# EAGLE board GRBLController (EAGLE 9.6.1)
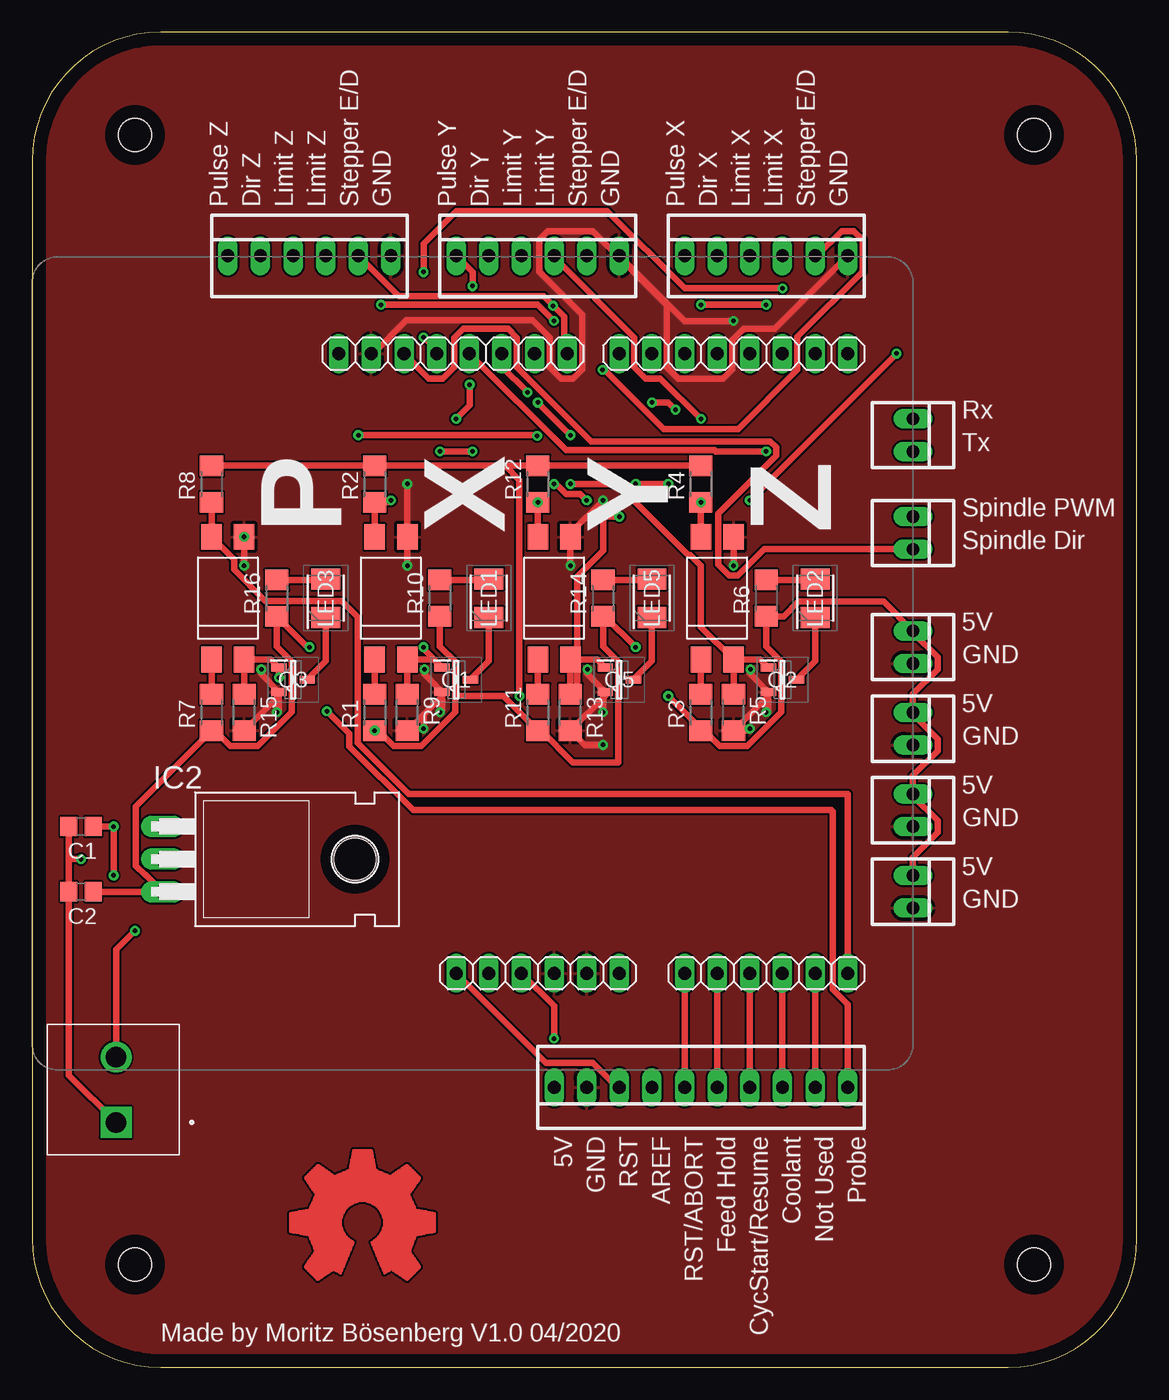
[diagram p0: board, top side]
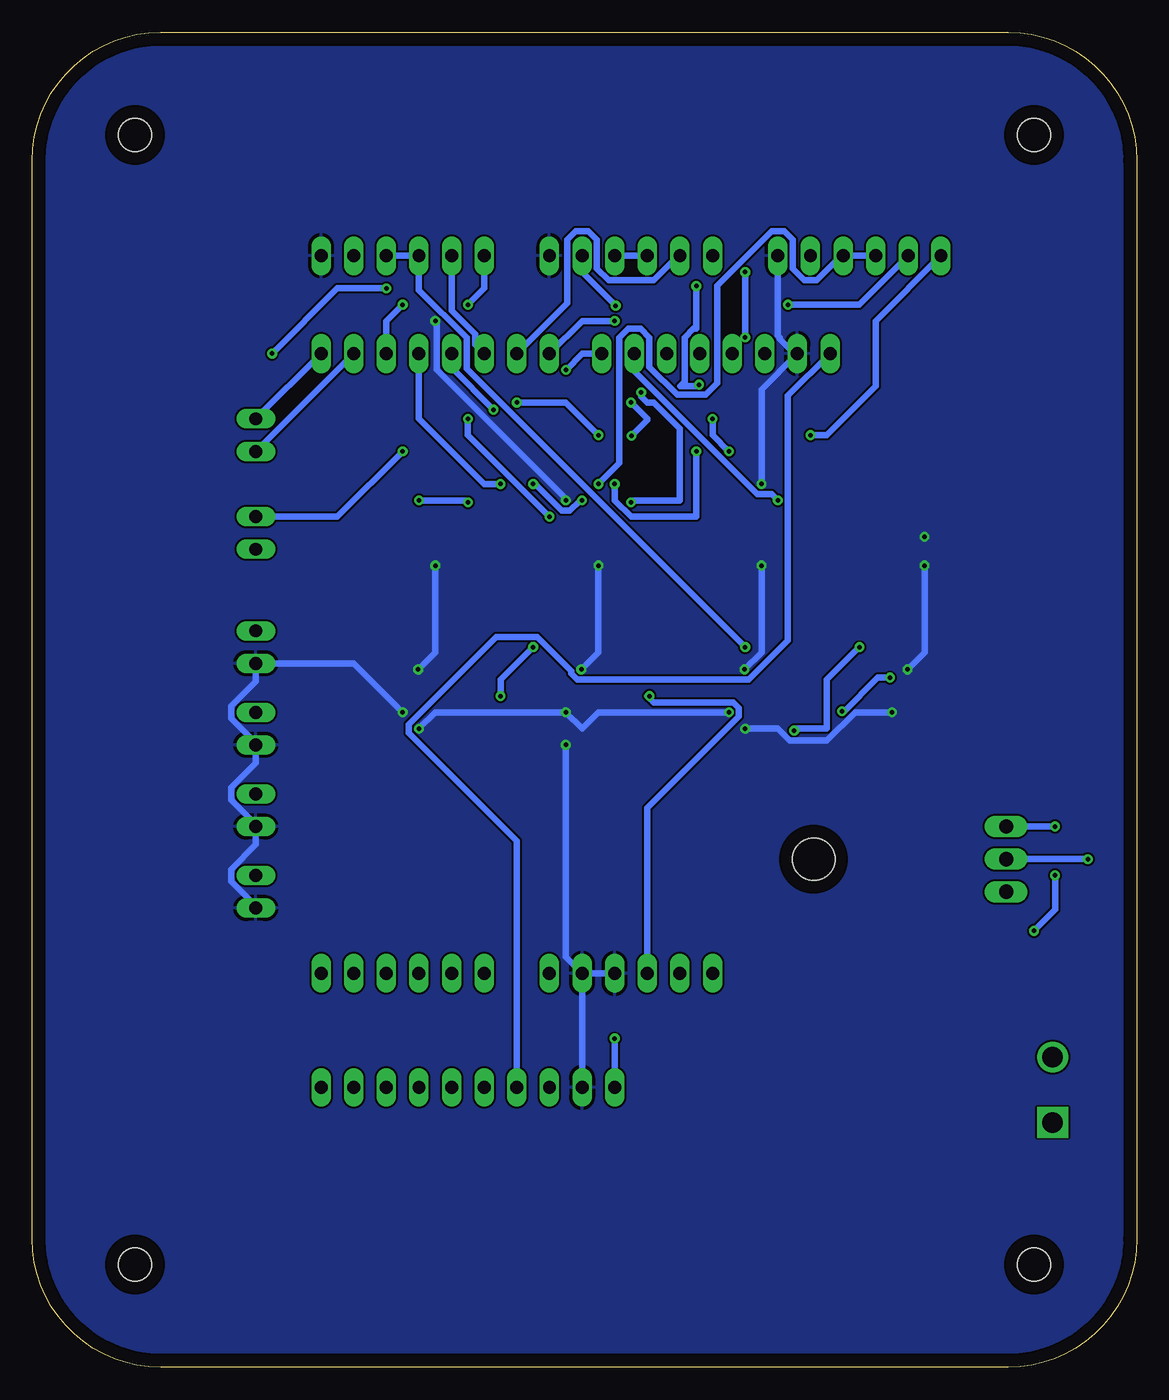
[diagram p1: board, bottom side, seen from below]

Size 86 x 104 mm. Coordinates in mm from the lower left corner, seen from the top.
Outline: 0,94 0,10 arc90 10,0 76,0 arc90 86,10 86,94 arc90 76,104 10,104 arc90 0,94
Copper layers (1*16): Top 0.035mm / dielectric 1.5mm / Bottom 0.035mm
Design rules "default": minimum track width 6mil, minimum drill 0.35mm, track to track 6mil, track to pad 6mil, pad to pad 6mil, via to via 6mil, smd to smd 6mil, copper to edge 40mil, drill to drill 6mil, minimum pad ring 10mil, minimum via ring 8mil, stop-mask expansion 4mil, vias tented up to drill 0mil, thermal gap 10mil
Holes 2.6 mm at 78,96 78,8 8,8 8,96

## Footprints (pad centres in the part's own frame; a part is rotated, then mirrored left to right if it is on the bottom)
C0805 = smd 1.3 x 1.5: 1 -0.95,0; 2 0.95,0
ARDUINO2009_2 = drill 1.016 long: 1 33.02,2.54; 2 35.56,2.54; 3 38.1,2.54; 4 40.64,2.54; 5 43.18,2.54; 6 45.72,2.54; 7 50.8,2.54; 8 53.34,2.54; 9 55.88,2.54; 10 58.42,2.54; 11 60.96,2.54; 12 63.5,2.54; 13 63.5,50.8; 14 60.96,50.8; 15 58.42,50.8; 16 55.88,50.8; 17 53.34,50.8; 18 50.8,50.8; 19 48.26,50.8; 20 45.72,50.8; 21 41.656,50.8; 22 39.116,50.8; 23 36.576,50.8; 24 34.036,50.8; 25 31.496,50.8; 26 28.956,50.8; 27 26.416,50.8; 28 23.876,50.8
TO220H = drill 1.118 long: 1 -2.54,-10.16; 2 0,-10.16; 3 2.54,-10.16 | hole 3.302: 0,4.826
CUI_TB007-508-02BE = drill 1.6 square: 1 0,0 | drill 1.6: 2 5.08,0
LEDM3528X200N = smd 1.65 x 2.25: 1 -1.5,0; 2 1.5,0
DIL4-SMD = smd 1.6 x 2: 1 -1.27,-4.77; 2 1.27,-4.77; 3 1.27,4.77; 4 -1.27,4.77
SOT95P237X122-3N = smd 1.2 x 0.6: 1 -1.1,0.95; 2 -1.1,-0.95; 3 1.1,0
R1206 = smd 1.6 x 1.803: 1 -1.422,0; 2 1.422,0
22-23-2021 = drill 1 long: 1 -1.27,0; 2 1.27,0
22-23-2101 = drill 1 long: 1 -11.43,0; 2 -8.89,0; 3 -6.35,0; 4 -3.81,0; 5 -1.27,0; 6 1.27,0; 7 3.81,0; 8 6.35,0; 9 8.89,0; 10 11.43,0
22-23-2061 = drill 1 long: 1 -6.35,0; 2 -3.81,0; 3 -1.27,0; 4 1.27,0; 5 3.81,0; 6 6.35,0

## Placement (x,y rotation side)
C1  470nF  [C0805]  3.81,42.13 180 top
C2  100nF  [C0805]  3.81,37.05 180 top
IC1  [ARDUINO2009_2]  0,28.16 0 top
IC2  7805T  [TO220H]  20.32,39.59 270 top
J1  SCREW_PITCH_508  [CUI_TB007-508-02BE]  6.54,19.08 90 top
LED1  PLCC2  [LEDM3528X200N]  35.56,59.91 90 top
LED2  PLCC2  [LEDM3528X200N]  60.96,59.91 90 top
LED3  PLCC2  [LEDM3528X200N]  22.86,59.91 90 top
LED5  PLCC2  [LEDM3528X200N]  48.26,59.91 90 top
OK1  LTVOPTOS  [DIL4-SMD]  27.94,59.91 0 top
OK2  LTVOPTOS  [DIL4-SMD]  53.34,59.91 0 top
OK3  LTVOPTOS  [DIL4-SMD]  15.24,59.91 0 top
OK5  LTVOPTOS  [DIL4-SMD]  40.64,59.91 0 top
Q1  FDN5632N-F085  [SOT95P237X122-3N]  33.02,53.56 0 top
Q2  FDN5632N-F085  [SOT95P237X122-3N]  58.42,53.56 0 top
Q3  FDN5632N-F085  [SOT95P237X122-3N]  20.32,53.56 0 top
Q5  FDN5632N-F085  [SOT95P237X122-3N]  45.72,53.56 0 top
R1  220  [R1206]  26.67,51.02 90 top
R2  1K  [R1206]  26.67,68.8 90 top
R3  220  [R1206]  52.07,51.02 90 top
R4  1K  [R1206]  52.07,68.8 90 top
R5  10K  [R1206]  54.61,51.02 270 top
R6  10K  [R1206]  57.15,59.91 90 top
R7  220  [R1206]  13.97,51.02 90 top
R8  1K  [R1206]  13.97,68.8 90 top
R9  10K  [R1206]  29.21,51.02 270 top
R10  10K  [R1206]  31.75,59.91 90 top
R11  220  [R1206]  39.37,51.02 90 top
R12  1K  [R1206]  39.37,68.8 90 top
R13  10K  [R1206]  41.91,51.02 270 top
R14  10K  [R1206]  44.45,59.91 90 top
R15  10K  [R1206]  16.51,51.02 270 top
R16  10K  [R1206]  19.05,59.91 90 top
X1  22-23-2021  [22-23-2021]  68.58,72.61 270 top
X2  22-23-2021  [22-23-2021]  68.58,64.99 270 top
X3  22-23-2101  [22-23-2101]  52.07,21.81 180 top
X4  22-23-2021  [22-23-2021]  68.58,56.1 270 top
X5  [22-23-2061]  57.15,86.58 0 top
X6  [22-23-2061]  39.37,86.58 0 top
X7  [22-23-2061]  21.59,86.58 0 top
X8  22-23-2021  [22-23-2021]  68.58,49.75 270 top
X9  22-23-2021  [22-23-2021]  68.58,43.4 270 top
X10  22-23-2021  [22-23-2021]  68.58,37.05 270 top

## Library data of the parts
C1 C2 = CommonParts; SPICEPREFIX: C
IC1 OK1-OK3 OK5 R1-R16 = CommonParts
IC2 = linear
J1 = CommonParts; CUI_PURCHASE_URL: https://www.cui.com/product/interconnect/connectors/terminal-blocks/tb007-508-series?utm_source=snapeda.com&utm_medium=referral&utm_campaign=snapedaBOM; DESCRIPTION: 2~24 Poles, Screw Type, Horizontal, 5.08 Pitch, 24~12 _AWG_, Terminal Block Connector; DIGI-KEY_PART_NUMBER: 102-6203-ND; DIGI-KEY_PURCHASE_URL: https://www.digikey.com/product-detail/en/cui-inc/TB007-508-02BE/102-6203-ND/10064127?utm_source=snapeda&utm_medium=aggregator&utm_campaign=symbol; MF: CUI Inc.; MP: TB007-508-02BE; PACKAGE: None
LED1-LED3 LED5 = CommonParts; DESCRIPTION: Cool White SMT LED, PLCC2 1800mcd Min. Broadcom ASMT-UWB1-NX302, ASMT-UWB Series White LED, 6250K, PLCC 2, Round Lens SMD package; HEIGHT: 2mm; MANUFACTURER_NAME: Avago Technologies; MANUFACTURER_PART_NUMBER: ASMT-UWB1-NX302; MOUSER2_PART_NUMBER: 630-ASMT-UWB1-NX302; MOUSER2_PRICE-STOCK: https://www.mouser.com/Search/Refine.aspx?Keyword=630-ASMT-UWB1-NX302
Q1-Q3 Q5 = CommonParts; DESCRIPTION: MOSFET Trans MOS N-Ch 60V 1.7A; HEIGHT: 1.22mm; MANUFACTURER_NAME: ON Semiconductor; MANUFACTURER_PART_NUMBER: FDN5632N-F085; MOUSER_PART_NUMBER: 512-FDN5632N-F085; MOUSER_PRICE-STOCK: https://www.mouser.com/Search/Refine.aspx?Keyword=512-FDN5632N-F085
X1 X2 X4 X8-X10 = con-molex; MF: MOLEX; MPN: 22-23-2021; OC_FARNELL: 1462926; OC_NEWARK: 25C3832
X3 = con-molex; MF: MOLEX; MPN: 22-23-2101; OC_FARNELL: 1756828; OC_NEWARK: 94C0765
X5-X7 = con-molex; MF: MOLEX; MPN: 22-23-2061; OC_FARNELL: 1462922; OC_NEWARK: 27C1933

## Nets
5V_ARDUINO: IC1.3 R2.2 R4.2 R8.2 R12.2 X3.10
5V_O: C2.1 IC2.3 R1.1 R3.1 R6.1 R7.1 R10.1 R11.1 R14.1 R16.1 X4.1 X8.1 X9.1 X10.1
24V: C1.1 IC2.1 J1.2
!RESET: IC1.1 X3.8
+3V3: IC1.2
+VIN: IC1.6
AGND: IC1.4 IC1.5 IC1.27 OK1.3 OK2.3 OK3.3 OK5.3 Q1.2 Q2.2 Q3.2 Q5.2 R5.2 R9.2 R13.2 R15.2 X3.9 X4.2 X5.6 X6.6 X7.6 X8.2 X9.2 X10.2
AREF: IC1.28 X3.7
COOLANT: IC1.10 X3.3
CYCLE_START/RESUME: IC1.9 X3.4
DIRECTION_X: IC1.18 X5.2
DIRECTION_Y: IC1.19 X6.2
DIRECTION_Z: IC1.20 X7.2
FEED_HOLD: IC1.8 X3.5
LIMIT_X: IC1.22 OK1.4 R2.1
LIMIT_X_SCREW: OK1.2 Q1.1 R9.1 X5.3 X5.4
LIMIT_Y: IC1.23 OK5.4 R12.1
LIMIT_Y_SCREW: OK5.2 Q5.1 R13.1 X6.3 X6.4
LIMIT_Z: IC1.25 OK2.4 R4.1
LIMIT_Z_SCREW: OK2.2 Q2.1 R5.1 X7.3 X7.4
N$1: OK1.1 R1.2
N$3: LED1.2 R10.2
N$4: LED1.1 Q1.3
N$5: OK5.1 R11.2
N$7: LED5.2 R14.2
N$8: LED5.1 Q5.3
N$9: OK2.1 R3.2
N$11: LED2.2 R6.2
N$12: LED2.1 Q2.3
N$13: OK3.1 R7.2
N$15: LED3.2 R16.2
N$16: LED3.1 Q3.3
N$17: C1.2 C2.2 IC2.2 J1.1
NOT_USED: IC1.11 X3.2
PROBE: IC1.12 OK3.4 R8.1
PROBE_SCREW: OK3.2 Q3.1 R15.1 X3.1
PULSE_X: IC1.15 X5.1
PULSE_Y: IC1.16 X6.1
PULSE_Z: IC1.17 X7.1
RESET/ABORT: IC1.7 X3.6
RX: IC1.13 X1.1
SPINDLE_DIRECTION: IC1.26 X2.2
SPINDLE_PWM: IC1.24 X2.1
STEPPER_ENABLE/DISABLE: IC1.21 X5.5 X6.5 X7.5
TX: IC1.14 X1.2

## Tracks (layer width: path | path; a pad name or v marks a point on that pad's centre or on a via)
5V_ARDUINO  (via drill 0.35)
  Top 0.508: R8.2 R2.2 36.83,70.22 | 36.83,70.22 R12.2 R4.2 | IC1.3 40.64,28.16 v40.64,25.62 | v37.94,52.29 37.94,69.11 36.83,70.22
  Bottom 0.508: v40.64,25.62 X3.10 | IC1.3 38.1,43.56 30.96,50.7 30.96,51.34 31.43,51.8 37.62,51.8 38.1,52.29 v37.94,52.29
5V_O  (via drill 0.35)
  Top 0.508: 32.93,52.29 32.93,51.04 30.28,48.39 28.14,48.39 26.93,49.6 R1.1 | 32.93,52.29 32.93,54.98 31.75,56.16 R10.1 31.75,58.64 | C2.1 IC2.3 8.87,38.34 8.81,38.34 8.08,39.07 8.08,43.7 R7.1 14.23,49.6 15.44,48.39 17.58,48.39 20.23,51.04 20.23,54.98 19.05,56.16 R16.1 21.44,56.1 v21.59,56.1 | 32.93,52.29 36.68,52.29 R11.1 39.63,49.6 42.11,47.12 45.63,47.12 45.63,54.98 44.45,56.16 R14.1 44.6,58.49 v46.99,56.1 | v49.53,52.29 52.07,49.75 R3.1 52.33,49.6 53.54,48.39 55.68,48.39 58.33,51.04 58.33,54.98 57.15,56.16 R6.1 58.51,58.49 59.67,59.64 66.31,59.64 X4.1 68.58,57.23 70.49,55.31 70.49,54.35 68.58,52.44 X8.1 68.58,50.88 70.49,48.96 70.49,48 68.58,46.09 X9.1 68.58,44.52 70.49,42.61 70.49,41.65 68.58,39.73 X10.1
  Bottom 0.508: v21.59,56.1 24.13,53.56 24.13,49.75 26.67,49.75 R1.1 | v46.99,56.1 49.53,53.56 v49.53,52.29
  other vias: 26.67,49.6
24V  (via drill 0.35)
  Top 0.508: C1.1 v6.35,42.13 v6.35,38.32 | J1.2 6.54,32.54 v8,34
  Bottom 0.508: IC2.1 v6.35,42.13 | v8,34 6.35,35.65 v6.35,38.32
!RESET
  Top 0.508: IC1.1 40,23.72 43.66,23.72 45.58,21.81 X3.8
AGND  (via drill 0.35)
  Top 0.508: Q2.2 57.32,52.31 R5.2 55.73,49.6 v55.88,49.75 | Q5.2 44.62,52.31 R13.2 43.03,48.48 v44.45,48.48 | Q1.2 31.92,52.31 30.48,50.87 | 30.48,50.87 R9.2 | Q3.2 19.22,52.31 R15.2 | Q3.2 17.84,53.99 v17.84,54.35 | v16.51,62.45 OK3.3 | Q1.2 30.54,53.99 v30.54,54.35 | v29.21,62.45 OK1.3 v29.21,68.8 | Q5.2 43.18,54.05 43.18,54.48 43.24,54.42 v43.24,54.35 | v41.91,62.45 OK5.3 41.91,64.99 v44.45,67.53 | Q2.2 55.88,54.05 55.88,54.48 55.94,54.42 v55.94,54.35 | v54.61,62.45 OK2.3 | Q3.2 19.22,51.19 v19.05,51.02 | v30.48,49.75 30.48,50.87 | Q1.2 31.92,51.19 v31.75,51.02 | v44.45,51.02 44.45,52.44 Q5.2 | Q2.2 57.32,51.19 v57.15,51.02 | v54.61,81.5 50.8,81.5 X6.6 | X5.6 57.81,80.89 55.4,80.89 54.51,80 54.51,77.71 53.82,77.03 50.32,77.03 49.43,77.92 49.43,82.73 43.66,88.49 40.16,88.49 39.48,87.81 39.48,85.34 42.82,82 42.82,77.71 42.14,77.03 41.17,77.03 40.28,77.92 40.28,80.21 38.94,81.55 29.13,81.55 26.54,78.96 IC1.27
  Bottom 0.508: v17.84,54.35 16.51,55.69 v16.51,62.45 | v30.54,54.35 29.21,55.69 v29.21,62.45 | v43.24,54.35 41.91,55.69 v41.91,62.45 | v55.94,54.35 54.61,55.69 v54.61,62.45 | v19.05,51.02 21.93,51.02 24.13,48.81 27,48.81 27.93,49.75 v30.48,49.75 | v31.75,51.02 41.91,51.02 43.18,49.75 v44.45,51.02 54.61,51.02 v55.88,49.75 | v29.21,68.8 29.21,76.17 26.54,78.83 | 26.54,78.83 IC1.27 | X7.6 27.94,80.36 27.79,80.21 27.79,80.08 26.54,78.83 | v57.15,51.02 60.96,54.83 X4.2 68.58,53.41 70.49,51.5 70.49,50.54 68.58,48.62 X8.2 68.58,47.06 70.49,45.15 70.49,44.19 68.58,42.27 X9.2 68.58,40.72 70.49,38.8 70.49,37.84 68.58,35.92 X10.2 | v54.61,81.5 54.51,81.4 54.51,77.71 44.45,67.66 v44.45,67.53 | IC1.4 IC1.5 | IC1.5 X3.9 | v44.45,48.48 44.45,31.97 IC1.5
  other vias: 16.51,64.68
  pour Top: 0,104 86,104 86,0 0,0
  pour Bottom: 0,104 86,104 86,0 0,0
AREF
  Bottom 0.508: X3.7 48.26,41.02 56.66,49.42 56.66,50.08 49.85,56.88 46.66,56.88 44.02,54.24 44.02,54.03 43.57,53.57 30.22,53.57 27.16,56.63 27.16,75.68 IC1.28
COOLANT
  Top 0.508: IC1.10 X3.3
CYCLE_START/RESUME
  Top 0.508: IC1.9 X3.4
DIRECTION_X
  Bottom 0.508: X5.2 53.34,82.31 51.51,80.48 51.51,79.67 IC1.18
DIRECTION_Y
  Bottom 0.508: X6.2 35.7,86.58 37.62,84.67 41.12,84.67 42.02,85.56 42.02,87.81 42.7,88.49 43.66,88.49 44.34,87.81 44.34,82.88 IC1.19
DIRECTION_Z  (via drill 0.35)
  Top 0.508: v27.16,82.77 39.37,82.77 v40.64,81.5
  Bottom 0.508: X7.2 21.59,82.77 v27.16,82.77 | v40.64,81.5 43.18,81.5 IC1.20
FEED_HOLD
  Top 0.508: IC1.8 X3.5
LIMIT_X  (via drill 0.35)
  Top 0.508: OK1.4 R2.1 27.79,67.38 v27.94,67.53
  Bottom 0.508: v27.94,67.53 28.43,68.02 29.54,68.02 39.12,77.6 IC1.22
LIMIT_X_SCREW  (via drill 0.35)
  Top 0.508: R9.1 OK1.2 31.29,55.14 Q1.1 30.48,55.95 v30.48,56.1
  Bottom 0.508: v30.48,56.1 52.17,77.79 52.17,80.21 55.88,83.91 X5.3 X5.4
LIMIT_Y  (via drill 0.35)
  Top 0.508: OK5.4 R12.1 | v38.58,75.94 36.58,77.94 IC1.23
  Bottom 0.508: R12.1 39.22,67.53 35.56,67.53 35.56,73.11 37.6,75.15 38.1,75.15 38.58,75.62 v38.58,75.94
  other vias: 39.37,67.38
LIMIT_Y_SCREW  (via drill 0.35)
  Top 0.508: Q5.1 43.99,55.14 OK5.2 R13.1 42.46,52.99 42.46,61.61 44.45,63.61 44.45,66.26 v45.72,66.26 | v52.07,73.88 48.92,77.03 47.78,77.03 46.89,77.92 46.89,80.21 40.64,86.45 X6.4
  Bottom 0.508: v45.72,66.26 52.07,72.61 v52.07,73.88 | X6.4 X6.3
LIMIT_Z  (via drill 0.35)
  Top 0.508: R4.1 OK2.4 | IC1.25 31.5,79.21 v30.48,80.23 | v30.48,85.31 30.48,87.52 33.02,90.06 44.78,90.06 50.8,84.04 v58.42,84.04 | v67.31,78.96 v55.88,67.53
  Bottom 0.508: v30.48,80.23 v30.48,85.31 | v58.42,84.04 62.23,84.04 v67.31,78.96 | v55.88,67.53 52.07,67.53 R4.1
  other vias: 52.07,67.38
LIMIT_Z_SCREW  (via drill 0.35)
  Top 0.508: Q2.1 56.69,55.14 OK2.2 | R5.1 OK2.2 | OK2.2 52.07,57.68 52.07,62.45 51.25,63.27 51.1,63.27 45.58,68.8 v41.91,68.8
  Bottom 0.508: v41.91,68.8 40.28,70.43 40.28,80.21 39.6,80.89 38.63,80.89 37.95,80.21 37.95,77.92 35.79,75.76 33.55,75.76 32.66,76.65 32.66,84.25 28.42,88.49 27.46,88.49 26.78,87.81 26.78,85.56 25.88,84.67 24.92,84.67 23,86.58 X7.4 X7.3
N$1
  Top 0.508: R1.2 OK1.1
N$3
  Top 0.508: R10.2 35.48,61.33 LED1.2
N$4
  Top 0.508: LED1.1 35.56,55 Q1.3
N$5
  Top 0.508: R11.2 OK5.1
N$7
  Top 0.508: R14.2 48.18,61.33 LED5.2
N$8
  Top 0.508: LED5.1 48.26,55 Q5.3
N$9
  Top 0.508: R3.2 OK2.1
N$11
  Top 0.508: R6.2 60.88,61.33 LED2.2
N$12
  Top 0.508: LED2.1 60.96,55 Q2.3
N$13
  Top 0.508: R7.2 OK3.1
N$15
  Top 0.508: LED3.2 22.78,61.33 R16.2
N$16
  Top 0.508: LED3.1 22.86,55 Q3.3
N$17  (via drill 0.35)
  Top 0.508: C1.2 2.86,39.59 | 2.86,39.59 C2.2 2.86,22.76 J1.1 | v3.81,39.59 2.86,39.59
  Bottom 0.508: IC2.2 v3.81,39.59
NOT_USED
  Top 0.508: IC1.11 X3.2
PROBE
  Top 0.508: R8.1 OK3.4 15.72,62.92 15.72,62.12 18.16,59.69 24.1,59.69 25.36,58.43 25.36,48.63 29.32,44.67 63.5,44.67 IC1.12
PROBE_SCREW  (via drill 0.35)
  Top 0.508: R15.1 OK3.2 18.59,55.14 Q3.1 v19.22,53.73 v19.21,53.73 19.13,53.64 | v22.95,51.11 24.7,49.35 24.7,48.36 29.66,43.4 62.23,43.4 62.33,43.3 62.33,29.45 63.5,28.29 X3.1
  Bottom 0.508: v19.21,53.73 20.16,53.73 22.86,51.02 v22.95,51.11
PULSE_X  (via drill 0.35)
  Top 0.508: v52.07,82.77 v57.15,82.77
  Bottom 0.508: X5.1 50.8,84.04 v52.07,82.77 | v57.15,82.77 58.42,81.5 IC1.15
PULSE_Y  (via drill 0.35)
  Top 0.508: X6.1 34.29,85.31 v34.29,84.22 34.29,84.09 | v49.53,68.8 48.26,68.8 v46.99,68.8 | v34.07,76.54 34.07,74.93 v33.02,73.88 | v31.75,71.34 v34.29,71.34 | v40.64,68.8 40.8,68.8 41.59,68.02 42.7,68.02 v43.18,67.53
  Bottom 0.508: v34.29,84.22 34.29,80.89 34.52,80.89 35.2,80.21 35.2,76.78 35.54,76.44 34.17,76.44 v34.07,76.54 | IC1.16 55.88,73.88 50.8,68.8 v49.53,68.8 | v33.02,73.88 33.02,72.61 v31.75,71.34 | v34.29,71.34 34.29,66.26 39.37,66.26 40.64,67.53 v40.64,68.8 | v46.99,68.8 46.83,68.8 44.77,66.75 44.12,66.75 43.34,67.53 v43.18,67.53
PULSE_Z  (via drill 0.35)
  Top 0.508: v25.4,72.61 39.37,72.61 v39.32,72.56 | v39.37,75.15 v41.91,72.61 | v48.26,75.15 49.53,75.15 v50.09,74.59
  Bottom 0.508: X7.1 20.32,81.5 20.32,76.42 24.13,72.61 v25.4,72.61 | v39.37,75.15 38.1,73.88 38.1,73.79 v39.32,72.56 | v41.91,72.61 44.45,75.15 v48.26,75.15 | v50.09,74.59 53.34,77.85 IC1.17
RESET/ABORT
  Top 0.508: IC1.7 X3.6
RX
  Bottom 0.508: X1.1 IC1.13
SPINDLE_DIRECTION
  Top 0.508: X2.2 56.99,63.72 54.94,61.66 54.28,61.66 53.4,62.55 53.4,66.48 57.94,71.02 57.94,71.66 57.48,72.12 43.54,72.12 37.74,77.92 37.74,80.21 37.06,80.89 33.55,80.89 32.87,80.21 32.87,77.92 31.98,77.03 30.89,77.03 IC1.26
SPINDLE_PWM  (via drill 0.35)
  Top 0.508: v57.15,71.34 53.23,71.34 53.14,71.43 41.57,71.43 IC1.24
  Bottom 0.508: X2.1 62.23,66.26 v57.15,71.34
STEPPER_ENABLE/DISABLE  (via drill 0.35)
  Top 0.508: X5.5 61.1,86.58 63.02,88.49 63.98,88.49 64.66,87.81 64.66,85.34 59.59,80.27 59.59,77.71 54.97,73.09 49.17,73.09 44.58,77.69 v44.43,77.69 | X7.5 28.55,83.43 39.82,83.43 v40.56,82.69 41.42,81.83 41.42,79.19 IC1.21
  Bottom 0.508: v44.43,77.69 43.16,78.96 IC1.21 | X6.5 43.18,85.31 v40.56,82.69
TX
  Bottom 0.508: X1.2 IC1.14
(copper drawn outside any net)
  shapes: Top area x369

## Text on the board
tNames: Pulse Z | Dir Z | Limit Z | Limit Z | Stepper E/D | GND | Pulse Y | Dir Y | Limit Y | Limit Y | Stepper E/D | GND | Pulse X | Dir X | Limit X | Limit X | Stepper E/D | GND | Rx | Tx | Spindle PWM | P | X | Y | Z | Spindle Dir | 5V | GND | 5V | GND | 5V | GND | 5V | GND | 5V | GND | RST | AREF | RST/ABORT | Feed Hold | CycStart/Resume | Coolant | Not Used | Probe | Made by Moritz Bösenberg V1.0 04/2020